# EAGLE board MicroOLEDWithKL02 (EAGLE 6.5.0)
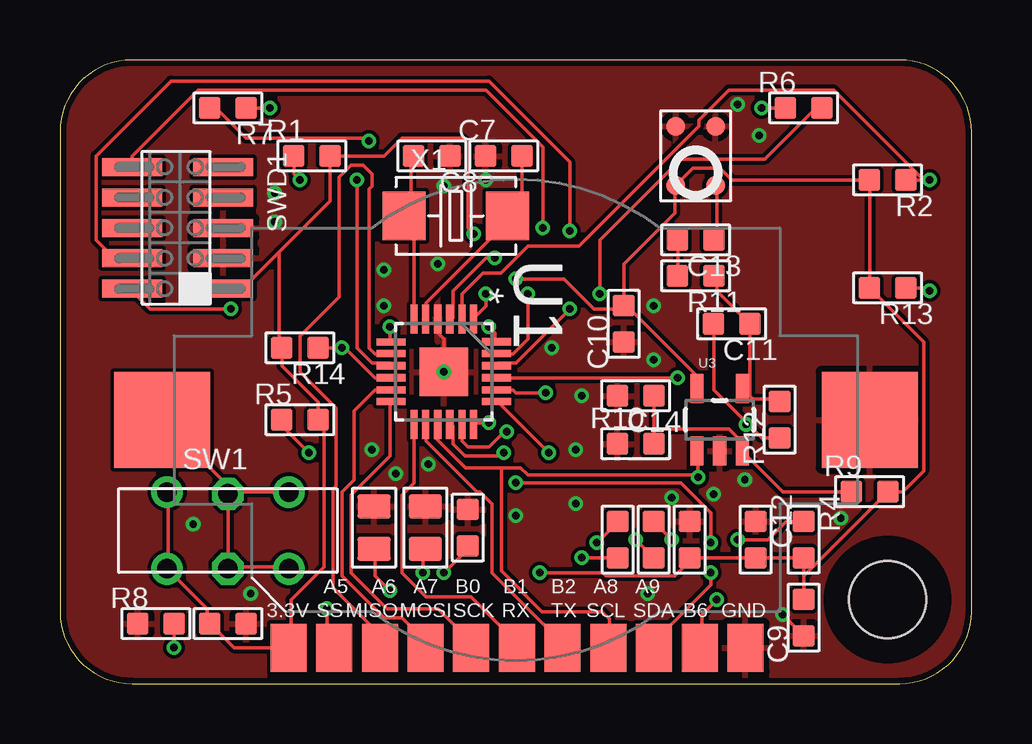
[diagram p0: board, top side]
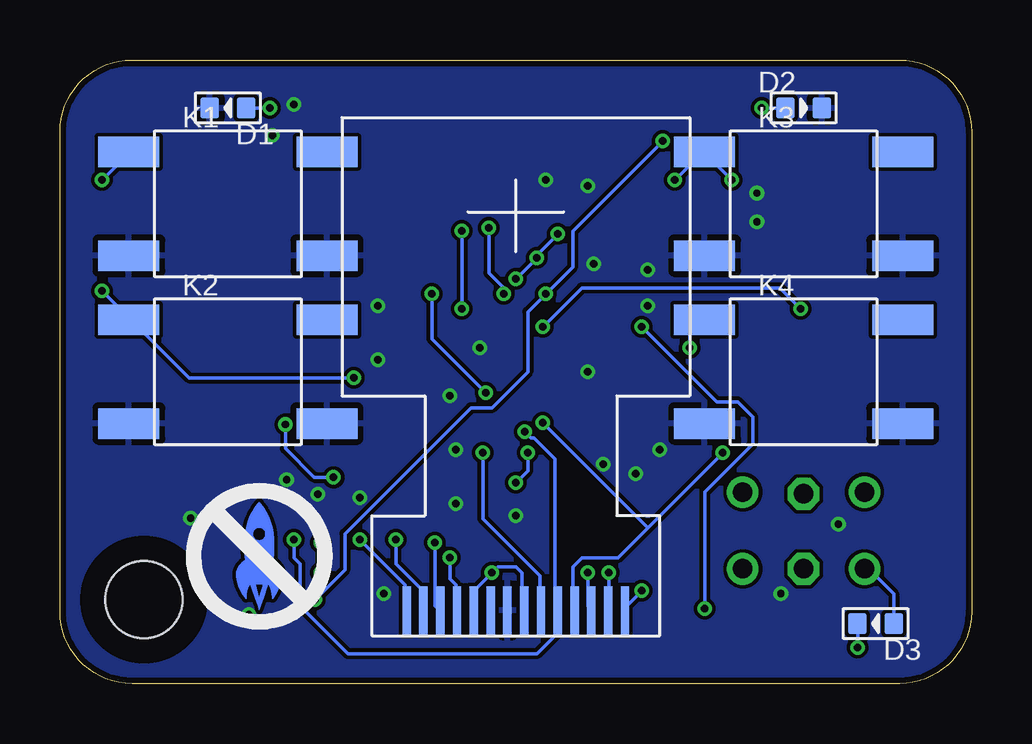
[diagram p1: board, bottom side, seen from below]

Size 38 x 26 mm. Coordinates in mm from the lower left corner, seen from the top.
Outline: 38,3 38,23 arc90 35,26 3,26 arc90 0,23 0,3 arc90 3,0 35,0 arc90 38,3
Copper layers (1*16): Top 0.035mm / dielectric 1.5mm / Bottom 0.035mm
Design rules "ITEADstudio_DRC": minimum track width 6mil, minimum drill 12mil, track to track 6mil, track to pad 6mil, pad to pad 6mil, via to via 6mil, smd to smd 0mil, copper to edge 10mil, drill to drill 10mil, minimum pad ring 10mil, minimum via ring 6mil, stop-mask expansion 2mil, vias tented up to drill 100mil, thermal gap 10mil

## Footprints (pad centres in the part's own frame; a part is rotated, then mirrored left to right if it is on the bottom)
C0805 = smd 1.016 x 1.397: 1 -0.889,0; 2 0.889,0
C0603 = smd 0.889 x 0.889: 1 -0.762,0; 2 0.762,0
LED0603 = smd 0.762 x 0.889: + -0.762,0; - 0.762,0
3.2-NOMARKINGS-SMALLSAFEZONE = hole 3.2: 0,0
4P-SMD-6.0X6.0X5.0H = smd 2.54 x 1.27: 1 -4.129,2.159; 2 -4.129,-2.159; 3 4.129,-2.159; 4 4.129,2.159
PAD-1.5X4.5 = smd 1.5 x 2: P$1 0,0
R0603 = smd 0.889 x 0.889: 1 -0.762,0; 2 0.762,0
6P-2CH-2.54-9.1X3.5X3.2+2H = drill 0.813 pad 1.27: CH1A -2.54,-1.6; CH1B 2.54,-1.6; CH2A -2.54,1.6; CH2B 2.54,1.6 | drill 0.813 pad 1.27 octagon: COM1 0,-1.6; COM2 0,1.524
M50-3600542 = smd 0.75 x 2.5: 1 -2.54,-1.81; 2 -2.54,2; 3 -1.27,-1.81; 4 -1.27,2; 5 0,-1.81; 6 0,2; 7 1.27,-1.81; 8 1.27,2; 9 2.54,-1.81; 10 2.54,2
QFN50P400X400X100-25N = smd 1.2 x 0.3: 1 -2.2,1.245; 2 -2.2,0.762; 3 -2.2,0.254; 4 -2.2,-0.254; 5 -2.2,-0.762; 6 -2.2,-1.245; 13 2.2,-1.245; 14 2.2,-0.762; 15 2.2,-0.254; 16 2.2,0.254; 17 2.2,0.762; 18 2.2,1.245 | smd 0.3 x 1.2: 7 -1.245,-2.2; 8 -0.762,-2.2; 9 -0.254,-2.2; 10 0.254,-2.2; 11 0.762,-2.2; 12 1.245,-2.2; 19 1.245,2.2; 20 0.762,2.2; 21 0.254,2.2; 22 -0.254,2.2 | smd 0.305 x 1.2: 23 -0.762,2.2; 24 -1.245,2.2 | smd 2.032 x 2.032: 25 0,0
SOT23-5 = smd 0.55 x 1.2: 1 -0.95,-1.3; 2 0,-1.3; 3 0.95,-1.3; 4 0.95,1.3; 5 -0.95,1.3
FPC-0.7-14 = smd 0.35 x 2: P$1 -4.55,1.05; P$2 -3.85,1.05; P$3 -3.15,1.05; P$4 -2.45,1.05; P$5 -1.75,1.05; P$6 -1.05,1.05; P$7 -0.35,1.05; P$8 0.35,1.05; P$9 1.05,1.05; P$10 1.75,1.05; P$11 2.45,1.05; P$12 3.15,1.05; P$13 3.85,1.05; P$14 4.55,1.05
LGAMS4 = smd 0.8 x 0.8: P1 0.825,1.23; P2 0.825,-1.23; P3 -0.825,-1.23; P4 -0.825,1.23
2032HOLDER-SZ = smd 4 x 4: MIN 0,-14.75; PLUS 0,14.75
2P-SMD-5.0X3.2 = smd 1.778 x 2.032: 1 -2.159,0; 2 2.159,0

## Placement (x,y rotation side)
C1  2.2uF  [C0805]  13.1,6.5 90 top
C2  4.7uF  [C0805]  15.23,6.5 270 top
C3  1uF  [C0603]  24.75,6 90 top
C4  1uF  [C0603]  23.25,6 90 top
C5  1uF  [C0603]  7,2.5 180 top
C6  1uF  [C0603]  26.25,6 270 top
C7  22pf  [C0603]  18.5,22 0 top
C8  22pf  [C0603]  15.5,22 180 top
C9  1uF  [C0603]  31,2.75 90 top
C10  100nF  [C0603]  23.5,15 90 top
C11  100pF  [C0603]  28,15 180 top
C12  100nF  [C0603]  29,6 270 top
C13  4.7uF  [C0603]  26.5,18.5 180 top
C14  1.0uF  [C0603]  24,12 180 top
D1  RED  [LED0603]  31,24 180 bottom
D2  GREEN  [LED0603]  7,24 0 bottom
D3  PWR  [LED0603]  4,2.5 180 bottom
H1  MOUNT-HOLE  [3.2-NOMARKINGS-SMALLSAFEZONE]  34.5,3.5 0 top
K1  BUTTON-4P-3100010P1  [4P-SMD-6.0X6.0X5.0H]  31,20 0 bottom
K2  BUTTON-4P-3100010P1  [4P-SMD-6.0X6.0X5.0H]  31,13 0 bottom
K3  BUTTON-4P-3100010P1  [4P-SMD-6.0X6.0X5.0H]  7,20 0 bottom
K4  BUTTON-4P-3100010P1  [4P-SMD-6.0X6.0X5.0H]  7,13 0 bottom
PTA5_SS  M01SMD-4.5X1.5  [PAD-1.5X4.5]  11.43,1.5 180 top
PTA6_MISO  M01SMD-4.5X1.5  [PAD-1.5X4.5]  13.34,1.5 180 top
PTA7_MOSI_MISO  M01SMD-4.5X1.5  [PAD-1.5X4.5]  15.24,1.5 180 top
PTA8_I2C1_SCL  M01SMD-4.5X1.5  [PAD-1.5X4.5]  22.86,1.5 0 top
PTA9_I2C1_SDA  M01SMD-4.5X1.5  [PAD-1.5X4.5]  24.77,1.5 0 top
PTB0_SCK  M01SMD-4.5X1.5  [PAD-1.5X4.5]  17.14,1.5 180 top
PTB1_RXTX  M01SMD-4.5X1.5  [PAD-1.5X4.5]  19.05,1.5 0 top
PTB2_TXRX  M01SMD-4.5X1.5  [PAD-1.5X4.5]  20.95,1.5 0 top
PTB2_TXRX1  M01SMD-4.5X1.5  [PAD-1.5X4.5]  9.53,1.5 180 top
PTB2_TXRX2  M01SMD-4.5X1.5  [PAD-1.5X4.5]  28.57,1.5 0 top
PTB6  M01SMD-4.5X1.5  [PAD-1.5X4.5]  26.67,1.5 0 top
R1  [R0603]  10.5,22 0 top
R2  [R0603]  34.5,21 180 top
R3  390K  [R0603]  17,6.5 270 top
R4  2k DNP  [R0603]  31,6 270 top
R5  2k DNP  [R0603]  10,11 0 top
R6  50  [R0603]  31,24 0 top
R7  50  [R0603]  7,24 180 top
R8  50  [R0603]  4,2.5 0 top
R9  10K  [R0603]  33.75,8 0 top
R10  10K  [R0603]  24,10 0 top
R11  1.5K  [R0603]  26.5,17 180 top
R12  100K  [R0603]  30,11 90 top
R13  [R0603]  34.5,16.5 180 top
R14  [R0603]  10,14 180 top
SW1  SWITCH-2CH-6P-3010010P1  [6P-2CH-2.54-9.1X3.5X3.2+2H]  7,6.38 0 top
SWD1  CORTEX_SWD  [M50-3600542]  5,19 90 top
U1  MKL02Z32VFK4  [QFN50P400X400X100-25N]  16,13 270 top
U3  OPA344  [SOT23-5]  27.5,11 0 top
U$1  0.49"OLED  [FPC-0.7-14]  19,2 0 bottom
U$2  [SMALLROCKET]  30,5 0 bottom
U$4  WM7120A  [LGAMS4]  26.5,22 180 top
U$5  COINCELL  [2032HOLDER-SZ]  19,11 90 top
X1  CRYSTAL-0500290P1  [2P-SMD-5.0X3.2]  16.5,19.5 0 top

## Library data of the parts
C1-C14 D1-D3 R1-R14 X1 = OPL
H1 K1-K4 SW1 U$2 = zephod-components
PTA5_SS PTA6_MISO PTA7_MOSI_MISO PTA8_I2C1_SCL PTA9_I2C1_SDA PTB0_SCK PTB1_RXTX PTB2_TXRX PTB2_TXRX1 PTB2_TXRX2 PTB6 = SparkFun-Connectors
SWD1 = carrilib with jtags
U1 = FarnellThings; MPN: MKL02Z32VFK4; OC_FARNELL: 2321481; OC_NEWARK: 61W9887; PACKAGE: QFN-24; SUPPLIER: FREESCALE SEMICONDUCTOR
U3 = SparkFun
U$1 = zephod-tft
U$4 = KL02Z
U$5 = BatteryHolder

## Nets
3.3V: C5.2 C6.2 C9.2 C10.2 C12.2 D3.+ PTB2_TXRX1.P$1 R1.2 R2.2 R4.2 R5.2 R9.2 R13.2 R14.2 SW1.CH1A SW1.CH2A SWD1.1 U1.3 U3.5 U$1.P$5 U$1.P$8 U$4.P1
BUTTON1: K1.1 R2.1 U1.2
BUTTON2: K3.1 R1.1 U1.9
BUTTON3: K4.1 R14.1 U1.10
BUTTON4: K2.1 R13.1 U1.21
GND: C1.2 C2.1 C5.1 C6.1 C7.1 C8.1 C9.1 C10.1 C12.1 C14.2 D1.- D2.- K1.2 K1.3 K2.2 K2.3 K3.2 K3.3 K4.2 K4.3 PTB2_TXRX2.P$1 R3.1 R8.1 R10.1 SWD1.3 SWD1.5 U1.4 U1.25 U3.2 U$1.P$7 U$4.P2 U$4.P3 U$5.MIN
N$1: C7.2 U1.5 X1.2
N$2: C8.2 U1.6 X1.1
N$3: C3.2 U$1.P$1
N$4: C4.2 U$1.P$3
N$5: SWD1.4 U1.22
N$6: D1.+ R6.1
N$7: SWD1.2 U1.24
N$8: U$1.P$6
N$9: R3.2 U$1.P$12
N$10: C1.1 U$1.P$14
N$11: C2.2 U$1.P$13
N$12: C3.1 U$1.P$2
N$13: C4.1 U$1.P$4
N$14: D2.+ R7.1
N$15: C13.1 U$4.P4
N$16: C11.1 R11.1 R12.2 U3.4
N$17: C13.2 R11.2
N$18: C14.1 R9.1 R10.2 U3.3
N$19: D3.- R8.2
N$20: SW1.CH1B SW1.CH2B SW1.COM1 SW1.COM2 U$5.PLUS
OLED_RESET: U1.19 U$1.P$9
OLED_SCL: R4.1 U1.17 U$1.P$10
OLED_SDA: R5.1 U1.18 U$1.P$11
PTA1: SWD1.10 U1.23
PTA5: PTA5_SS.P$1 U1.7
PTA6: PTA6_MISO.P$1 U1.8
PTA7: PTA7_MOSI_MISO.P$1 U1.11
PTA8: C11.2 PTA8_I2C1_SCL.P$1 R12.1 U1.15 U3.1
PTA9: PTA9_I2C1_SDA.P$1 U1.16
PTA12: R6.2 U1.20
PTB0: PTB0_SCK.P$1 U1.12
PTB1: PTB1_RXTX.P$1 U1.13
PTB2: PTB2_TXRX.P$1 U1.14
PTB6: PTB6.P$1 R7.2 U1.1

## Tracks (layer width: path | path; a pad name or v marks a point on that pad's centre or on a via)
3.3V  (via drill 0.3)
  Top 0.152: SW1.CH2A 4.5,7.88 4.5,4.88 SW1.CH1A 4.5,4.75 6.12,3.12 6.12,2.5 C5.2 7.25,1.5 PTB2_TXRX1.P$1 9.62,1.5 9.62,3.5 11,4.88 11,10.88 10.88,11 R5.2 10.75,11.75 9.25,13.25 R14.2 9.12,14 9.12,18 | 9.12,18 7.62,16.5 6.88,16.5 SWD1.1 | 9.12,18 11.25,20.12 R1.2 13.5,22 14.25,22.75 16.75,22.75 17,22.5 17,19 v17.25,18.75 | C12.2 C6.2 26.25,5.12 25.62,4.5 22.75,4.5 22.62,4.62 v20,4.62 | 31,4.5 R4.2 C12.2 | 31,4.5 C9.2 | 31,4.5 R9.2 35.12,8 36,8.88 36,14.25 R13.2 | C12.2 | R13.2 R2.2 28,21 27.5,21.5 26.38,21.5 25.75,20.88 U$4.P1 25.62,20.75 25.62,19.62 23.5,17.5 23.5,15.88 | v18.12,17.75 17.75,17.75 16.38,16.38 16.38,15.25 U1.3 | v19,16.88 21,16.88 22.25,15.62 23.38,15.62 C10.2 23.5,15.88 | 23.5,15.88 26.5,12.88 26.5,12.38 U3.5 | R13.2
  Bottom 0.152: D3.+ 3.25,3.75 4.38,4.88 SW1.CH1A | U$1.P$5 20.75,3.88 v20,4.62 19.75,4.88 19,4.88 18.75,4.62 18.75,3.12 U$1.P$8 | v19,16.88 v18.12,17.75 18.12,17.88 v17.25,18.75
BUTTON1  (via drill 0.3)
  Top 0.152: 36,21 R2.1 | 36,21 32.25,24.75 27.88,24.75 26.62,23.5 26.62,23.25 21.62,18.25 19.5,18.25 18.38,17.12 17.62,17.12 16.75,16.25 16.75,15.25 U1.2 | 36,21 v36.25,21
  Bottom 0.152: v36.25,21 35.12,22.12 K1.1
BUTTON2  (via drill 0.3)
  Top 0.152: v10,21 9.75,21.25 R1.1 | v12.38,21 12.38,14 13,13.38 13.75,13.38 U1.9
  Bottom 0.152: v10,21 11.12,22.12 K3.1 11.25,22.12 v12.38,21
BUTTON3  (via drill 0.3)
  Top 0.152: R14.1 v11.75,14 11.88,14 13.12,12.75 13.75,12.75 U1.10
  Bottom 0.152: v11.75,14 11.75,14.62 11.25,15.12 K4.1
BUTTON4  (via drill 0.3)
  Top 0.152: R13.1 36.12,16.5 v36.25,16.38 | v25.75,12.75 18.25,12.75 U1.21
  Bottom 0.152: 35.12,15.25 v36.25,16.38 | v25.75,12.75 32.62,12.75 35.12,15.25 | 35.12,15.25 K2.1
GND  (via drill 0.3)
  Top 0.152: U1.25 16,14.38 15.75,14.62 15.75,15.12 U1.4 | v30.12,2.88 C9.1
  other vias: 16,13 21.5,7.5 21.5,9.75 21.75,12 20.5,14 24.75,13.5 24.75,15.75 19,7 15.35,9.15 24.5,3.75 25.5,7.75 13,9.75 14,8.75 13.5,17.25 13.5,15.75 15.75,17.5 16,20.75 17.75,21 27.25,7.9 28.55,8.5 32.55,6.9 7.95,3.75 5.55,6.65 29.15,22.85 28.25,24.15 8.95,20.45 8.95,19.25
  pour Top: 0,3 0,23 arc-90 3,26 35,26 arc-90 38,23 38,3 arc-90 35,0 3,0 arc-90
  pour Bottom: 0,3 0,23 arc-90 3,26 35,26 arc-90 38,23 38,3 arc-90 35,0 3,0 arc-90
N$1
  Top 0.152: C7.2 19.25,20 18.75,19.5 X1.2 18.62,19.5 18.62,19.25 15.25,15.88 15.25,15.25 U1.5
N$2
  Top 0.152: 14.38,19.5 14.62,19.75 14.62,22 C8.2 | 14.38,19.5 14.75,19.12 14.75,15.25 U1.6 | 14.38,19.5 X1.1
N$3  (via drill 0.3)
  Top 0.152: v25.5,6 C3.2
  Bottom 0.152: v25.5,6 23.62,4.12 23.62,3.12 U$1.P$1
N$4  (via drill 0.3)
  Top 0.152: v22.38,5.88 C4.2
  Bottom 0.152: v22.38,5.88 22.38,3.25 22.25,3.12 U$1.P$3
N$5  (via drill 0.3)
  Top 0.152: v21.25,15.62 19,13.38 18.25,13.38 U1.22 | v21.25,18.88 21.25,21.75 17.88,25.12 4.62,25.12 1.5,22 1.5,18.5 2.25,17.75 3,17.75 SWD1.4
  Bottom 0.152: v21.25,18.88 v21.25,15.62
N$6  (via drill 0.3)
  Top 0.152: R6.1 v29.25,24
  Bottom 0.152: v29.25,24 R6.1
N$7  (via drill 0.3)
  Top 0.152: v17.88,14.88 18.12,14.62 18.12,14.25 U1.24 | v7.12,15.62 3.75,15.62 3,16.38 SWD1.2
  Bottom 0.152: v17.88,14.88 16.25,16.5 8,16.5 v7.12,15.62
N$9  (via drill 0.3)
  Top 0.152: v16,4.62 17,5.62 R3.2
  Bottom 0.152: v16,4.62 16,3.25 15.88,3.12 U$1.P$12
N$10  (via drill 0.3)
  Top 0.152: v13.75,3.88 13.12,4.5 13.12,5.5 C1.1
  Bottom 0.152: v13.75,3.88 14.5,3.12 U$1.P$14
N$11  (via drill 0.3)
  Top 0.152: v15.12,4.62 15.12,5.5 C2.2
  Bottom 0.152: v15.12,4.62 15.12,3.12 U$1.P$13
N$12  (via drill 0.3)
  Top 0.152: v24,6 C3.1
  Bottom 0.152: v24,6 24,5 22.88,3.88 22.88,3.12 U$1.P$2
N$13  (via drill 0.3)
  Top 0.152: v21.75,5.25 C4.1
  Bottom 0.152: v21.75,5.25 21.75,4.38 21.5,4.12 21.5,3.12 U$1.P$4
N$14  (via drill 0.3)
  Top 0.152: R7.1 v8.75,24
  Bottom 0.152: v8.75,24 R7.1
N$15
  Top 0.152: U$4.P4 27.38,20.75 27.38,18.5 C13.1
N$16
  Top 0.152: 28.75,12 28.5,12.25 U3.4 | 28.75,12 28.88,11.88 30,11.88 R12.2 | 28.75,12 C11.1 | C11.1 27.38,16.38 27.38,17 R11.1 | C11.1
N$17
  Top 0.152: R11.2 C13.2
N$18
  Top 0.152: 24.75,10.62 C14.1 | 24.75,10.62 R10.2 | R9.1 30.12,8 28.5,9.62 U3.3 28.38,9.75 28.38,10.12 27.88,10.62 24.75,10.62
N$19  (via drill 0.3)
  Top 0.152: v4.75,1.5 R8.2
  Bottom 0.152: v4.75,1.5 R8.2
N$20
  Top 0.152: 7,4.88 9.5,4.88 SW1.CH1B | 7.25,8 9.5,8 SW1.CH2B | 7.25,8 7,8 SW1.COM2 | SW1.COM2 7,4.88 | 7,4.88 SW1.COM1 | 7.25,8 U$5.PLUS | 7.25,8 SW1.COM2
OLED_RESET  (via drill 0.3)
  Top 0.152: v20.38,9.62 18.25,11.75 U1.19
  Bottom 0.152: v20.38,9.62 20.38,6.88 18,4.5 18,3.12 U$1.P$9
OLED_SCL  (via drill 0.3)
  Top 0.152: v28.25,6 29.5,6 30.25,6.75 R4.1 | v18.62,10.5 18.5,10.5 17.88,9.88 17,9.88 16.75,10.12 16.75,10.75 U1.17
  Bottom 0.152: v28.25,6 28.25,5.25 28,5 28,3.25 26,1.25 18.12,1.25 17.25,2.12 U$1.P$10 17.25,3.12 17.38,3.25 17.38,9.38 18.25,10.25 18.38,10.25 v18.62,10.5
OLED_SDA  (via drill 0.3)
  Top 0.152: v10.38,9.62 9.25,10.75 R5.1 | v17.88,10.88 17.25,10.88 U1.18
  Bottom 0.152: 13.5,6.5 14.75,5.25 16.25,5.25 16.62,4.88 16.62,3.12 U$1.P$11 | 13.5,6.5 v10.38,9.62 | 13.5,6.5 v17.88,10.88
PTA1  (via drill 0.3)
  Top 0.152: v19.5,16.25 19.5,14.38 18.88,13.75 18.25,13.75 U1.23 | v20.12,19 20.12,22.38 17.75,24.75 5.75,24.75 3,22 SWD1.10
  Bottom 0.152: v19.5,16.25 19.5,16.5 20.12,17.12 v20.12,19
PTA5  (via drill 0.3)
  Top 0.152: v13.75,14.88 13.75,14.25 U1.7 | v11.12,3.12 11.12,1.75 11.38,1.5 PTA5_SS.P$1
  Bottom 0.152: v13.75,14.88 10.62,11.75 9.75,11.75 9.12,11.12 9.12,10 11.12,8 v11.12,3.12
PTA6
  Top 0.152: U1.8 13.75,13.75 13.12,13.75 12.88,14 12.88,20.62 13,20.75 13,21.25 12.62,21.62 12.12,21.62 11.62,21.12 11.62,16.12 10,14.5 10,13 11.5,11.5 11.5,8.25 11.38,8.12 11.38,4 13.25,2.12 13.25,1.5 PTA6_MISO.P$1
PTA7
  Top 0.152: U1.11 13.75,12.25 13.12,12.25 12.25,11.38 12.25,8.5 11.75,8 11.75,4.5 13.5,2.75 14.25,2.75 15.12,1.88 15.12,1.5 PTA7_MOSI_MISO.P$1
PTA8  (via drill 0.3)
  Top 0.152: 28.65,10.85 29.25,10.25 R12.1 | 28.65,10.85 27.25,12.25 C11.2 | 26.6,8.7 26.6,9.6 U3.1 | v28.6,10.8 28.65,10.85 | 26.6,8.7 19.5,8.7 19.2,9 18.4,9 | 18.4,9 16.9,9 15.7,10.2 15.7,10.8 U1.15 | 26.6,8.7 v26.6,8.6 | 18.4,9 18.4,4.7 20.1,3 22.6,3 22.9,2.7 22.9,1.5 PTA8_I2C1_SCL.P$1
  Bottom 0.152: v26.6,8.6 27.4,8.6 28.6,9.8 v28.6,10.8
PTA9  (via drill 0.3)
  Top 0.152: v18.5,9.62 18.38,9.5 16.88,9.5 16.38,10 16.38,10.75 U1.16 | v19,8.38 25.88,8.38 27.12,7.12 v27.12,5.88 | v27.12,4.62 27.12,4.12 24.88,1.88 24.88,1.5 PTA9_I2C1_SDA.P$1
  Bottom 0.152: v18.5,9.62 18.5,8.88 v19,8.38 | v27.12,4.62 v27.12,5.88
PTA12  (via drill 0.3)
  Top 0.152: R6.2 31.5,24 29.38,21.88 25.88,21.88 22.5,18.5 v22.5,16.25 | v20.25,12.12 19,12.12 18.88,12.25 18.25,12.25 U1.20
  Bottom 0.152: v22.5,16.25 22.5,14.38 v20.25,12.12
PTB0
  Top 0.152: U1.12 13.75,11.75 13.75,9.5 12.12,7.88 12.12,4.62 13.62,3.12 15.75,3.12 17.12,1.75 17.12,1.5 PTB0_SCK.P$1
PTB1
  Top 0.152: U1.13 14.75,10.75 14.75,8.38 14.25,7.88 14.25,4.62 15.25,3.62 17.12,3.62 19,1.75 19,1.5 PTB1_RXTX.P$1
PTB2
  Top 0.152: U1.14 15.25,10.75 15.25,10.12 17.38,8 17.5,8 18,7.5 18,4.62 20.88,1.75 20.88,1.5 PTB2_TXRX.P$1
PTB6  (via drill 0.3)
  Top 0.152: R7.2 6.5,24 7.75,22.75 12.75,22.75 v12.88,22.62 | v17.75,16.25 17.75,15.75 17.25,15.25 U1.1 | v27.38,3.5 26.75,2.88 26.75,1.5 PTB6.P$1
  Bottom 0.152: v12.88,22.62 16.62,18.88 16.62,17.38 v17.75,16.25 18.5,15.5 18.5,13 20,11.5 20.88,11.5 26.12,6.25 26.12,4.75 v27.38,3.5

## Text on the board
tPlace: A5 | A6 | A7 | B0 | B1 | B2 | A8 | A9 | 3.3V | SS | MISO | MOSI | SCK | RX | TX | SCL | SDA | B6 | GND